# Altium PCB UC-526 - 1.PcbDoc
Units mil, origin at the board's own origin, x right, y up, seen from the top; angles counter-clockwise.
Board outline 1574.8 x 1574.8 mil, 2 copper layers (Top Layer, Bottom Layer); 115 components, 127 nets, 531 pads, 51 vias.
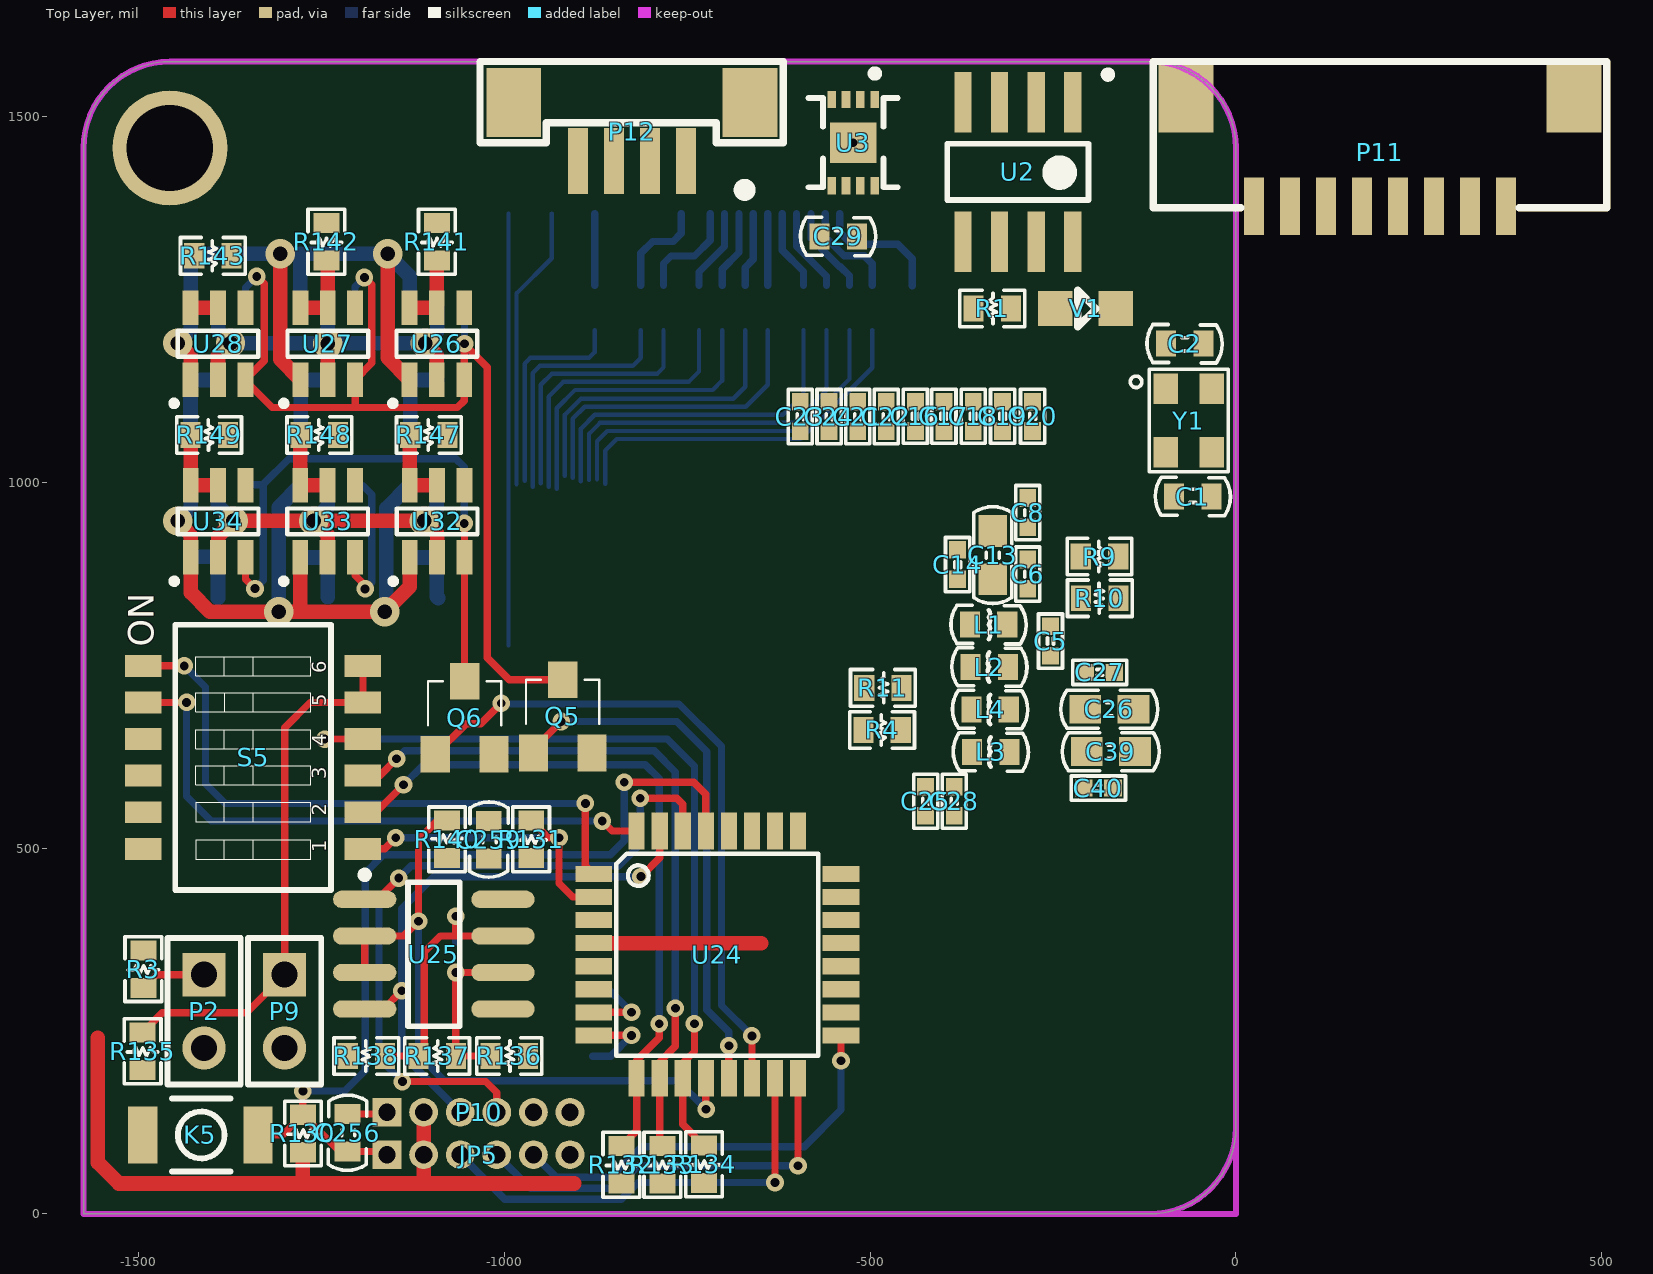
[diagram p0: Top Layer view]
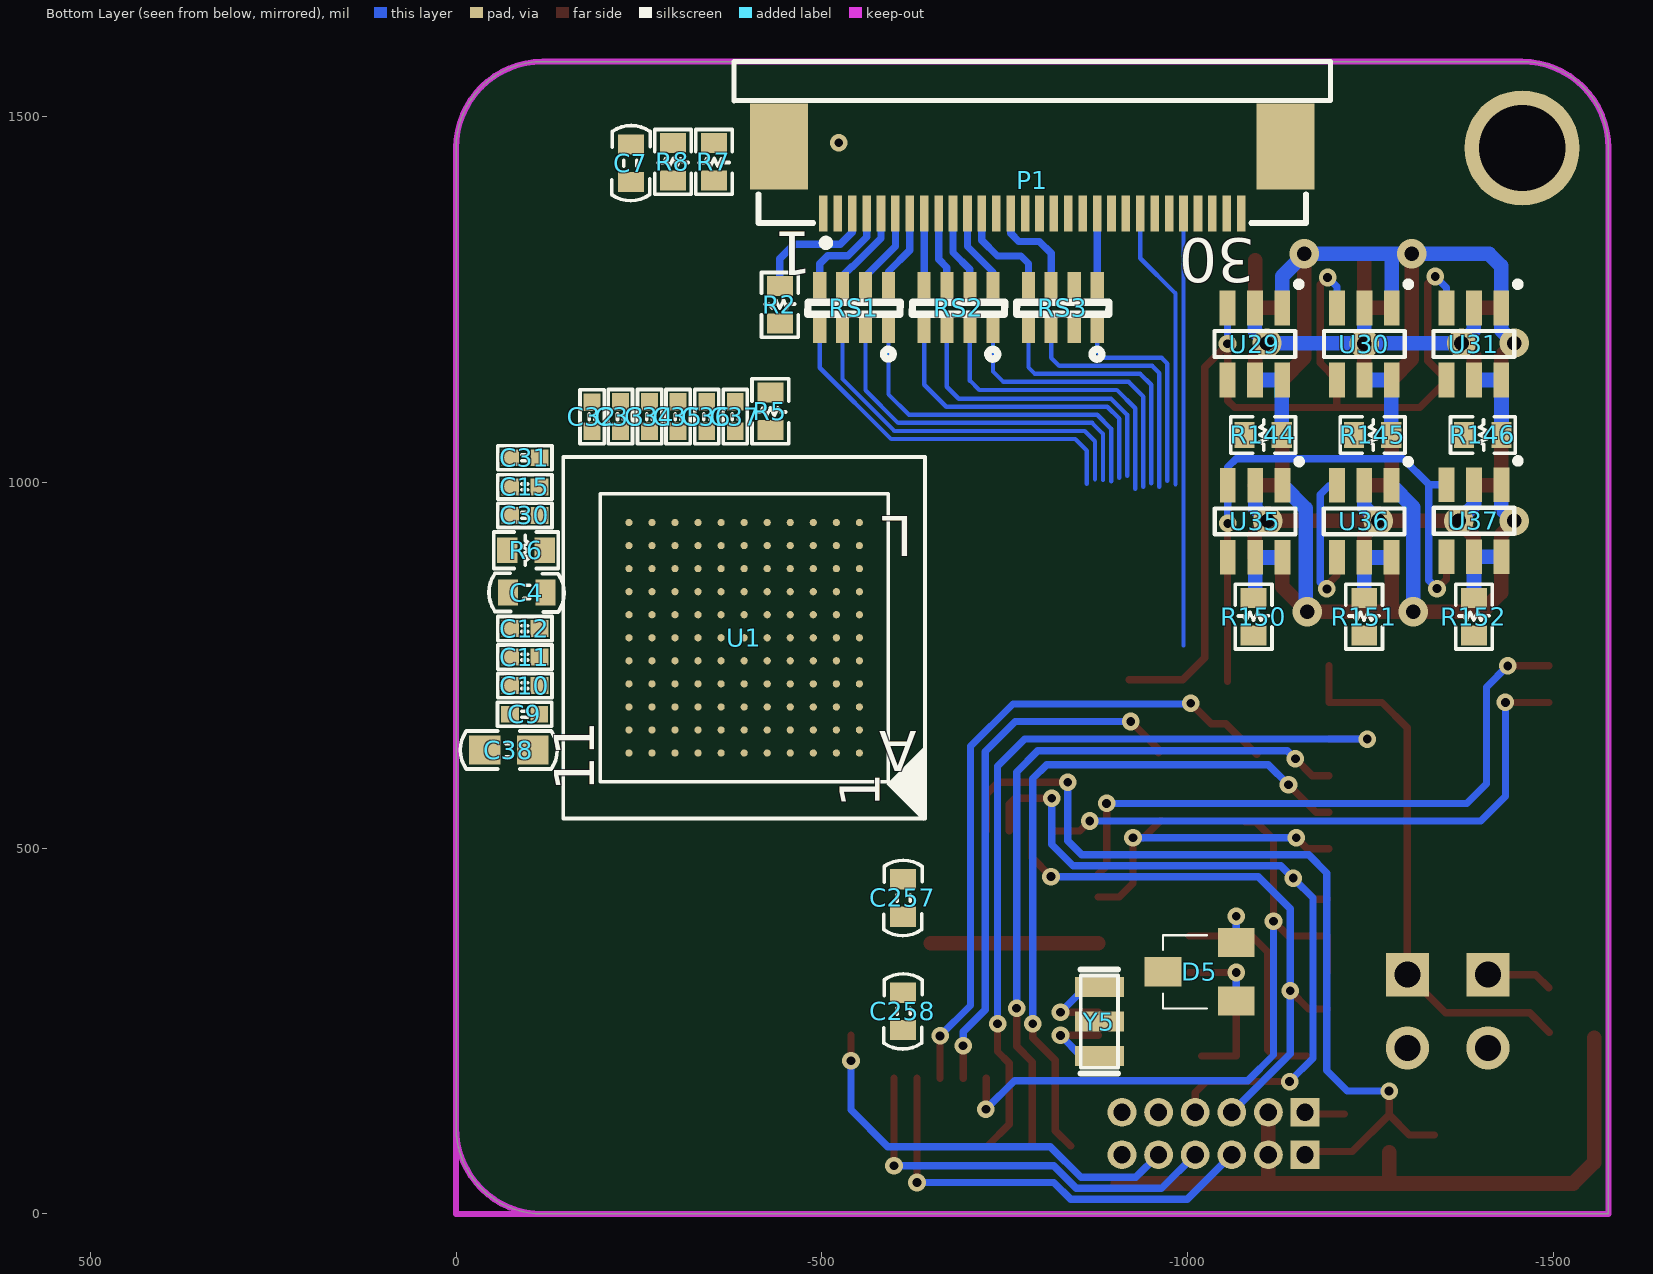
[diagram p1: Bottom Layer view, seen from below]

## Layer stack, top to bottom
Top Layer: signal copper 1.4
Dielectric: dielectric 12.6, FR-4, Dk 4.8
Bottom Layer: signal copper 1.4

## Board outline
-1574.8,0 -118.11,0 ccw(c-118.11,118.11) 0,118.11 0,1456.69 ccw(c-118.11,1456.69) -118.11,1574.8 -1456.69,1574.8 ccw(c-1456.69,1456.69) -1574.8,1456.69

## Design rules (kind name [scope] priority, off if disabled: settings)
Clearance [All] p1: gap=5
DiffPairsRouting [All] p1: maxlimit=10 minlimit=10 mostfreqgap=10 maxuncoupledlength=500
PolygonConnect [All] p1: connectstyle=Relief reliefconductorwidth=10 reliefentries=4 polygonreliefangle="90 Angle"
RoutingVias [All] p1: holewidth=28 width=50 viastyle="Through Hole" minholewidth=28 minwidth=50 maxholewidth=28 maxwidth=50
SilkscreenOverComponentPads [All] p1: minsilkscreentomaskgap=10
SolderMaskExpansion [All] p1: expansion=4
Width [All] p1: maxlimit=50 minlimit=5 preferedwidth=10
26 further rules are at their usual default settings.

## Classes and differential pairs
component class "LED_Driver - 1": C244 C245 C246 C247 C256 C257 C258 C259 D5 D22 D23 JP1 JP5 K1 K5 P9 P10 P11 P12 P13 Q5 Q6 R118 R119 R120 R121 R122 R123 R124 R125 R126 R127 R128 R129 R130 R131 R132 R133 R134 R135 R136 R137 R138 R140 R141 R142 R143 R144 R145 R146 R147 R148 R149 R150 R151 R152 S1 S5 U24 U25 U26 U27 U28 U29 U30 U31 U32 U33 U34 U35 U36 U37 Y5 Y6
component class "Cyusb3014 - 1": C1 C2 C4 C5 C6 C7 C8 C9 C10 C11 C12 C13 C14 C15 C16 C17 C18 C19 C20 C21 C22 C23 C24 C25 C26 C27 C28 C29 C30 C31 C32 C33 C34 C35 C36 C37 C38 C39 C40 L1 L2 L3 L4 P1 P2 R1 R2 R3 R4 R5 R6 R7 R8 R9 R10 R11 RS1 RS2 RS3 U1 U2 U3 V1 Y1
differential pair SST: +SST_P -SST_N

## Components (designator, comment, footprint, x,y, rotation, side; value= is the part's Value field where it differs from the comment)
C1 "12pF" 0603S-CAP -58.91,980.31 r0 top
C2 "12pF" 0603S-CAP -70.09,1189.31 r180 top
C4 "0.1u" 0603S-CAP -96.41,849 r180 bottom
C5 "0.1u" C0402 -253.4,782.99 r270 top
C6 "0.01u" C0402 -284.4,874.4 r90 top
C7 "0.1uF" 0603S-CAP -239,1436 r90 bottom
C8 "0.1u" C0402 -284.4,958.4 r270 top
C9 "0.01u" C0402 -93.69,683 r0 bottom
C10 "0.01u" C0402 -94,722 r0 bottom
C11 "0.01u" C0402 -94,761 r0 bottom
C12 "0.01u" C0402 -94,800 r0 bottom
C13 "2.2u" C0805S-CAP -332.4,900.4 r90 top
C14 "0.1u" C0402 -380.4,887.4 r90 top
C15 "0.01u" C0402 -94,993.5 r0 bottom
C16 "0.01u" C0402 -437.9,1090 r90 top
C17 "0.01u" C0402 -398.98,1090 r90 top
C18 "0.01u" C0402 -358.98,1090 r90 top
C19 "0.01u" C0402 -318.98,1090 r90 top
C20 "0.01u" C0402 -277.98,1090 r90 top
C21 "0.1u" C0402 -516.9,1089.71 r90 top
C22 "0.1u" C0402 -477.9,1089.71 r90 top
C23 "0.1u" C0402 -595.32,1089.71 r90 top
C24 "0.1u" C0402 -555.9,1089.71 r90 top
C25 "0.1u" C0402 -424,564 r90 top
C26 "22u" C0805S-CAP -173,689.81 r0 top
C27 "0.1u" C0402 -186,740 r0 top
C28 "0.1u" C0402 -385,564 r90 top
C29 "0.1u" 0603S-CAP -543.59,1336 r180 top
C30 "0.1u" C0402 -94,954.58 r0 bottom
C31 "0.1u" C0402 -94,1033.5 r0 bottom
C32 "0.1u" C0402 -185.9,1089.4 r90 bottom
C33 "0.1u" C0402 -224.56,1089.71 r90 bottom
C34 "0.1u" C0402 -264.48,1089.71 r90 bottom
C35 "0.1u" C0402 -303.48,1089.71 r90 bottom
C36 "0.1u" C0402 -342.48,1089.71 r90 bottom
C37 "0.1u" C0402 -381.48,1089.71 r90 bottom
C38 "22u" C0805S-CAP -72,634 r0 bottom
C39 "22u" C0805S-CAP -171,631.81 r0 top
C40 "0.1u" C0402 -188,582 r0 top
C256 "0.1uF" C0603 -1214,111 r90 top
C257 "0.1uF" C0603 -610.6,431.81 r90 bottom
C258 "0.1uF" C0603 -610.6,276.81 r90 bottom
C259 "0.1u" C0603 -1021,511.59 r90 top
D5 "SM712" SOT23-3 -1016,331 r90 bottom
JP5 "Header 3X2" MHDR1X6 -1160,81 r0 top
K5 "SW-PB" 157SW -1494,108 r180 top
L1 "磁珠" L0603 -337.99,805.4 r180 top
L2 "磁珠" L0603 -336.99,747.4 r0 top
L3 "磁珠" L0603 -334.99,631.4 r0 top
L4 "磁珠" L0603 -335.99,689.4 r0 top
P1 "30PIN" FH12-30S-0.5SH -787.4,1412.95 r180 bottom locked
P2 "Header 2" HDR1X2 -1410,327 r270 top
P9 "Header 2" HDR1X2 -1300,327 r270 top
P10 "FTDI Basic" MHDR1X6 -1160,139 r0 top
P11 "Header 8" SH_1.25MM*8 196.85,1524.87 r180 top
P12 "Header 4" SMT_1.25MM*4 -825.4,1479.4 r0 top
Q5 "BSS138" "SOT-23 (STANDARD)" -960,630 r0 top
Q6 "BSS138" "SOT-23 (STANDARD)" -1094,628 r0 top
R1 "10K" 0603S-RES -332.99,1237.4 r180 top
R2 "0" 0603S-RES -442.4,1242.4 r270 bottom
R3 "4.7K" 0603S-RES -1493,334.59 r90 top
R4 "4.7K" 0603S-RES -483.52,661.44 r0 top
R5 "4.7K" 0603S-RES -429.4,1096.93 r90 bottom
R6 "4.7K" 0603S-RES -95.59,907 r180 bottom
R7 "4.7K" 0603S-RES -352.42,1437.79 r90 bottom
R8 "4.7K" 0603S-RES -296.42,1437.79 r90 bottom
R9 "0" 0603S-RES -186.4,898.4 r0 top
R10 "6.04K-1%" 0603S-RES -185.99,841.4 r0 top
R11 "200-1%" 0603S-RES -482.41,719 r180 top
R130 "10K" R0603 -1275,110 r270 top
R131 "10K" R0603 -963,512 r270 top
R132 "10K" R0603 -839.88,67.28 r270 top
R133 "10K" R0603 -783.88,67.28 r270 top
R134 "10K" R0603 -727,68 r270 top
R135 "10K" R0603 -1494,222.41 r270 top
R136 "4.7K" R0603 -993,216 r0 top
R137 "120" R0603 -1091.59,216 r0 top
R138 "4.7K" R0603 -1188.18,216 r180 top
R140 "10K" R0603 -1078,512 r90 top
R141 "5.1" R0603 -1092,1328.6 r270 top
R142 "5.1" R0603 -1243,1328.6 r270 top
R143 "5.1" R0603 -1398,1309.4 r180 top
R144 "5.1" R0603 -1102.79,1064.61 r180 bottom
R145 "5.1" R0603 -1252.45,1064.61 r180 bottom
R146 "5.1" R0603 -1403.04,1064.61 r180 bottom
R147 "5.1" R0603 -1102.79,1064.61 r180 top
R148 "5.1" R0603 -1252.45,1064.61 r180 top
R149 "5.1" R0603 -1403.04,1064.61 r180 top
R150 "5.1" R0603 -1090,816.19 r90 bottom
R151 "5.1" R0603 -1241,816.19 r90 bottom
R152 "5.1" R0603 -1391,816.19 r90 bottom
RS1 "22" NC06-4 -591.4,1207.84 r0 bottom
RS2 "22" NC06-4 -734.07,1207.74 r0 bottom
RS3 "22" NC06-4 -876.57,1207.74 r0 bottom
S5 "SW DIP-6" DIP_SW_6WAY_SMD -1343,624 r90 top locked
U1 "FX3_121_BUMP_0" 121_BGA_FX3 -393.7,787.4 r0 bottom locked
U2 "M24M02-DRMN6TP" SOIC127P600X175-8N -298,1424 r270 top
U3 "ATSHA204-MAH-DA-T" UDFN -523,1464 r270 top
U24 "ATMEGA328" TQFP32-08 -708.66,354.33 r0 top locked
U25 "MAX485CSA" SOIC-8 -1096.08,355 r0 top locked
U26 "AL5802" SOT26 -1092,1189.4 r90 top
U27 "AL5802" SOT26 -1241,1189.4 r90 top
U28 "AL5802" SOT26 -1391,1189.4 r90 top
U29 "AL5802" SOT26 -1091.6,1188.83 r270 bottom
U30 "AL5802" SOT26 -1241.21,1188.83 r270 bottom
U31 "AL5802" SOT26 -1390.81,1188.83 r270 bottom
U32 "AL5802" SOT26 -1091.6,946.4 r90 top
U33 "AL5802" SOT26 -1241.21,946.4 r90 top
U34 "AL5802" SOT26 -1390.81,946.4 r90 top
U35 "AL5802" SOT26 -1092,946.4 r270 bottom
U36 "AL5802" SOT26 -1241,946.4 r270 bottom
U37 "AL5802" SOT26 -1391,947.4 r270 bottom
V1 "Red" LED0805S -205.4,1237.4 r0 top
Y1 "19.2MHZ" "爱普生晶振3.2×2.5MM - 无源" -64.5,1084.31 r270 top
Y5 "16MHz" RESONATOR-SMD -879,263 r90 bottom

## Footprints (in the part's own frame and the unit in brackets; to place one, negate y for a bottom-side part, rotate by r counter-clockwise, add the part's x,y. Pads: shape width x height; smd on the part's side, far side on the other; paste and mask are expansions set on the pad)
121_BGA_FX3 [mil]
  round 9.85 smd: A1(-157.45,157.45) A2(-125.96,157.45) A3(-94.47,157.45) A4(-62.98,157.45) A5(-31.49,157.45) A6(0,157.45) A7(31.49,157.45) A8(62.98,157.45) A9(94.47,157.45) A10(125.96,157.45) A11(157.45,157.45) B1(-157.45,125.96) B2(-125.96,125.96) B3(-94.47,125.96) B4(-62.98,125.96) B5(-31.49,125.96) B6(0,125.96) B7(31.49,125.96) B8(62.98,125.96) B9(94.47,125.96) B10(125.96,125.96) B11(157.45,125.96) C1(-157.45,94.47) C2(-125.96,94.47) C3(-94.47,94.47) C4(-62.98,94.47) C5(-31.49,94.47) C6(0,94.47) C7(31.49,94.47) C8(62.98,94.47) C9(94.47,94.47) C10(125.96,94.47) C11(157.45,94.47) D1(-157.45,62.98) D2(-125.96,62.98) D3(-94.47,62.98) D4(-62.98,62.98) D5(-31.49,62.98) D6(0,62.98) D7(31.49,62.98) D8(62.98,62.98) D9(94.47,62.98) D10(125.96,62.98) D11(157.45,62.98) E1(-157.45,31.49) E2(-125.96,31.49) E3(-94.47,31.49) E4(-62.98,31.49) E5(-31.49,31.49) E6(0,31.49) E7(31.49,31.49) E8(62.98,31.49) E9(94.47,31.49) E10(125.96,31.49) E11(157.45,31.49) F1(-157.45,0) F2(-125.96,0) F3(-94.47,0) F4(-62.98,0) F5(-31.49,0) F6(0,0) F7(31.49,0) F8(62.98,0) F9(94.47,0) F10(125.96,0) F11(157.45,0) G1(-157.45,-31.49) G2(-125.96,-31.49) G3(-94.47,-31.49) G4(-62.98,-31.49) G5(-31.49,-31.49) G6(0,-31.49) G7(31.49,-31.49) G8(62.98,-31.49) G9(94.47,-31.49) G10(125.96,-31.49) G11(157.45,-31.49) H1(-157.45,-62.98) H2(-125.96,-62.98) H3(-94.47,-62.98) H4(-62.98,-62.98) H5(-31.49,-62.98) H6(0,-62.98) H7(31.49,-62.98) H8(62.98,-62.98) H9(94.47,-62.98) H10(125.96,-62.98) H11(157.45,-62.98) J1(-157.45,-94.47) J2(-125.96,-94.47) J3(-94.47,-94.47) J4(-62.98,-94.47) J5(-31.49,-94.47) J6(0,-94.47) J7(31.49,-94.47) J8(62.98,-94.47) J9(94.47,-94.47) J10(125.96,-94.47) J11(157.45,-94.47) K1(-157.45,-125.96) K2(-125.96,-125.96) K3(-94.47,-125.96) K4(-62.98,-125.96) K5(-31.49,-125.96) K6(0,-125.96) K7(31.49,-125.96) K8(62.98,-125.96) K9(94.47,-125.96) K10(125.96,-125.96) K11(157.45,-125.96) L1(-157.45,-157.45) L2(-125.96,-157.45) L3(-94.47,-157.45) L4(-62.98,-157.45) L5(-31.49,-157.45) L6(0,-157.45) L7(31.49,-157.45) L8(62.98,-157.45) L9(94.47,-157.45) L10(125.96,-157.45) L11(157.45,-157.45)
  silkscreen extent -247,-247 247,250
157SW [mil]
  rect 40x78 smd: 1(0,0) 2(-157.5,0)
  silkscreen extent -120,-50 -40,50
0603S-CAP [mm]
  rect 0.7x0.9 smd: 1(-0.65,0) 2(0.65,0)
  silkscreen extent -1.31,-0.67 1.31,0.67
0603S-RES [mm]
  rect 0.7x0.9 smd: 1(-0.65,0) 2(0.65,0)
  silkscreen extent -1.12,-0.64 1.12,0.64
C0402 [mil]
  rect 24x23 smd: 1(-20,0) 2(20,0)
  silkscreen extent -37,-17 37,17, body extent -20,-10 19,10, height 20
C0603 [mm]
  rect 0.7x0.9 smd: 1(0.65,0) 2(-0.65,0)
  silkscreen extent -1.31,-0.67 1.31,0.67
C0805S-CAP [mm]
  rect 1.1x1 smd: 1(0.838,0) 2(-0.838,0)
  silkscreen extent -1.68,-0.66 1.68,0.66
DIP_SW_6WAY_SMD [mm]
  rect 0.76x1.27 smd: 1(-3.175,-3.81) 2(-1.905,-3.81) 3(-0.635,-3.81) 4(0.635,-3.81) 5(1.905,-3.81) 6(3.175,-3.81) 7(3.175,3.81) 8(1.905,3.81) 9(0.635,3.81) 10(-0.635,3.81) 11(-1.905,3.81) 12(-3.175,3.81)
  silkscreen extent -4.6,-2.7 4.6,2.7
FH12-30S-0.5SH [mm]
  rect 0.3x1.25 smd: 1(-7.25,-1.162) 2(-6.75,-1.162) 3(-6.25,-1.162) 4(-5.75,-1.162) 5(-5.25,-1.162) 6(-4.75,-1.162) 7(-4.25,-1.162) 8(-3.75,-1.162) 9(-3.25,-1.162) 10(-2.75,-1.162) 11(-2.25,-1.162) 12(-1.75,-1.162) 13(-1.25,-1.162) 14(-0.75,-1.162) 15(-0.25,-1.162) 16(0.25,-1.162) 17(0.75,-1.162) 18(1.25,-1.162) 19(1.75,-1.162) 20(2.25,-1.162) 21(2.75,-1.162) 22(3.25,-1.162) 23(3.75,-1.162) 24(4.25,-1.162) 25(4.75,-1.162) 26(5.25,-1.162) 27(5.75,-1.162) 28(6.25,-1.162) 29(6.75,-1.162) 30(7.25,-1.162)
  rect 2x3 smd: 31(-8.79,1.163) 31(8.79,1.163)
  silkscreen extent -10.35,-2.31 10.35,4.11
HDR1X2 [mm]
  rect 1.5x1.5 hole 0.9: 1(0,0)
  round 1.5 hole 0.9: 2(2.54,0)
  silkscreen extent -1.27,-1.27 3.81,1.27
L0603 [mm]
  rect 0.7x0.9 smd: 1(-0.65,0) 2(0.65,0)
  silkscreen extent -1.31,-0.67 1.31,0.67
LED0805S [mm]
  rect 1.2x1.2 smd: 1(-1.05,0) 2(1.05,0)
  silkscreen extent -0.27,-0.64 0.36,0.63, body extent -0.98,-0.46 1.08,0.45, height 0.85
MHDR1X6 [mm]
  rect 1x1 hole 0.6: 1(0,0)
  round 1 hole 0.6: 2(1.27,0) 3(2.54,0) 4(3.81,0) 5(5.08,0) 6(6.35,0)
NC06-4 [mil]
  rect 18x36 smd: 1(94.4,-0.16) 2(63.39,-0.16) 3(31.9,-0.16) 4(0.4,-0.16) 5(0.4,-61.16) 6(31.9,-61.16) 7(63.39,-61.16) 8(94.4,-61.16)
  silkscreen extent -16,-38 111,40
R0603 [mm]
  rect 0.7x0.9 smd: 1(0.65,0) 2(-0.65,0)
  silkscreen extent -1.12,-0.64 1.12,0.64
RESONATOR-SMD [mm]
  rect 0.7x1.7 smd: 1(-1.2,0) 2(0,0) 3(1.2,0)
  silkscreen extent -1.8,-0.65 1.8,0.65
SH_1.25MM*8 [mm]
  rect 0.7x2 smd: 1(-4.375,3.75) 2(-3.125,3.75) 3(-1.875,3.75) 4(-0.625,3.75) 5(0.625,3.75) 6(1.875,3.75) 7(3.125,3.75) 8(4.375,3.75)
  rect 1.9x2.4 smd: 9(-6.731,0) 9(6.731,0)
  silkscreen extent -7.87,-1.27 7.87,3.81
SMT_1.25MM*4 [mm]
  rect 0.7x2.3 smd: 1(1.875,-1.025) 2(0.625,-1.025) 3(-0.625,-1.025) 4(-1.875,-1.025)
  rect 1.9x2.4 smd: 7(-4.1,1) 7(4.1,1)
  silkscreen extent -5.28,-2.16 5.25,2.42
SOIC127P600X175-8N [mm]
  rect 2.1x0.6 smd: 1(-2.425,1.905) 2(-2.425,0.635) 3(-2.425,-0.635) 4(-2.425,-1.905) 5(2.425,-1.905) 6(2.425,-0.635) 7(2.425,0.635) 8(2.425,1.905)
  silkscreen extent -3.5,-2.45 0.98,3.25, body extent -1.95,-2.45 1.95,2.45, height 1.75
SOIC-8 [mm]
  oval 2.2x0.6 smd: 1(-2.4,1.905) 2(-2.4,0.635) 3(-2.4,-0.635) 4(-2.4,-1.905) 5(2.4,-1.905) 6(2.4,-0.635) 7(2.4,0.635) 8(2.4,1.905)
  silkscreen extent -2.52,-2.5 0.9,2.88, body extent -2,-2.5 2,2.5, height 1.75
SOT23-3 [mil]
  rect 40x50 smd: 1(40,-50) 2(-40,-50) 3(0,50)
  silkscreen extent -50,-10 50,50, body extent -59,-52 59,46, height 42
SOT26 [mm]
  rect 1.2x0.55 smd: 1(-1.25,0.95) 2(-1.25,0) 3(-1.25,-0.95) 4(1.25,-0.95) 5(1.25,0) 6(1.25,0.95)
  silkscreen extent -2.17,-1.4 0.45,1.62
"SOT-23 (STANDARD)" [mil]
  rect 40x50 smd: D(40,100) G(0,0) S(80,0)
  silkscreen extent -10,40 90,100, body extent -19,-2 99,96, height 42
TQFP32-08 [mil]
  rect 50x22 smd: 1(-169,110.24) 2(-169,78.74) 3(-169,47.25) 4(-169,15.75) 5(-169,-15.74) 6(-169,-47.24) 7(-169,-78.74) 8(-169,-110.24) 17(169.01,-110.23) 18(169,-78.73) 19(169,-47.24) 20(169,-15.74) 21(169,15.75) 22(169,47.25) 23(169,78.74) 24(169,110.24)
  rect 22x50 smd: 9(-110.24,-169) 10(-78.74,-169) 11(-47.24,-168.99) 12(-15.74,-169) 13(15.75,-169) 14(47.25,-169) 15(78.74,-169) 16(110.24,-169) 25(110.24,169) 26(78.74,169) 27(47.25,169) 28(15.75,169) 29(-15.75,169) 30(-47.24,169) 31(-78.73,169) 32(-110.23,169)
  silkscreen extent -138,-138 138,138
UDFN [mm]
  rect 0.6x0.3 smd: 1(-1.5,0.75) 2(-1.5,0.25) 3(-1.5,-0.25) 4(-1.5,-0.75) 5(1.5,-0.75) 6(1.5,-0.25) 7(1.5,0.25) 8(1.5,0.75)
  rect 1.4x1.6 smd: 4(0,0)
  silkscreen extent -2.52,-1.55 1.55,1.55, body extent -1.5,-1 1.52,1, height 0.6
"爱普生晶振3.2×2.5MM - 无源" [mm]
  rect 1.05x0.85 smd: 1(-1.1,-0.8) 2(1.1,0.8) 3(1.1,-0.8) 4(-1.1,0.8)
  Top Layer pour cut-out: -1.778,1.372 -1.778,-1.372 1.778,-1.372 1.778,1.372
  silkscreen extent -1.78,-2.03 1.78,1.37

## Part data
C1 C2: library part "CAP CER SMT 4.3pF 0805", "CAP CER SMT 4.3pF 0805"
C4: library part Cap, "50V/8.2u/0805"
C5 C6 C8 C9 C10 C11 C12 C13 C14 C15 C16 C17 C18 C19 C20 C21 C22 C23 C24 C25 C26 C27 C28 C30 C31 C32 C33 C34 C35 C36 C37 C38 C39 C40: library part CAP0805, "Capacitor"
C7: library part "CAP SMT 0.1uF 16V X7R", "CAP SMT 0.1uF 16V X7R"
C29: library part CAP, "RC=1206"
C256 C257 C258: library part "CAP SMT C100nF25V10%X7R", "Capacitor"
C259: library part Cap, "Capacitor"
JP5: "Header, 3-Pin, Dual row"
K5: "Switch"
L1 L2 L3 L4: library part Inductor, "Inductor"
P1: library part "Header 30", "Header, 30-Pin"
P2 P9: "Header, 2-Pin"
P10: library part ARDUINO_SERIAL_PROGRAMPTH
P11: "Header, 8-Pin"
P12: "Header, 4-Pin"
Q5 Q6: library part NMOS
R1 R2 R3 R4 R5 R6 R7 R8 R9 R10 R11 R130 R131 R132 R133 R134 R135 R136 R137 R138 R140 R141 R142 R143 R144 R145 R146 R147 R148 R149 R150 R151 R152: library part Res2, "Resistor"
RS1 RS2 RS3: library part RN4
S5: "DIP Switch, 6 Position, SPST"
U2: library part 24LC64-I/SN, "IC EEPROM 64KBIT 400KHZ 8SOIC"
U3: library part AT24C128
U24: library part ATMEGA168
U25: library part MAX3485CSA
V1: library part LED0, "Typical INFRARED GaAs LED"
Y1: library part "XTAL 32.768KHZ", "Crystal, CRYSTAL 32.768KHZ 6PF SMD"
Y5: library part RESONATORSMD

## Free pads (board coordinates)
  round 157.48 hole 118.11: 0(-1456.69,1456.69)

## Via types
v1: diameter 24, hole 12, Top Layer to Bottom Layer, tented both sides, 38 vias
v2: diameter 40, hole 20, Top Layer to Bottom Layer, tented both sides, 12 vias
v3: diameter 24, hole 12, Top Layer to Bottom Layer, 1 vias

## Nets (pads, with @x,y where several pads share a name; then routed paths per layer and width w, separated by ;. In a path a pad name is that pad's centre, name@x,y a point inside that pad or via, vN(x,y) a via of type N, cw(c..) or ccw(c..) an arc to the next point about the centre after c; other vN are vias at no path point)
A0: U24.23
A1: U24.24
A2: U24.25
A3: U24.26
A4: U24.27
A5: U24.28
A6: U24.19
A7: U24.22
AD1: R131.2 S5.1 U24.2 | length 439.2
  Top Layer w10: S5.1 -1163,499 v1(-1148,514) ; R131.2 -939.41,514 v1(-925,514) -925,452 -906.07,433.07 U24.2
  Bottom Layer w10: v1(-1148,514) v1(-925,514)
AD2: R132.2 S5.2 U24.9 | length 963.4
  Top Layer w10: S5.2 -1175,549 v1(-1137.5,586.5) ; R132.2 -818.9,113.86 U24.9 -818.9,210.1 -788,241 v1(-788,260)
  Bottom Layer w10: v1(-1137.5,586.5) -1110,614 -807,614 -788,595 v1(-788,260)
AD3: R133.2 S5.3 U24.10 | length 974.5
  Top Layer w10: S5.3 -1170.11,599 -1147.11,622 v1(-1147,622) ; R133.2 -787.4,96.39 U24.10 -787.4,207.6 -766,229 v1(-766,281)
  Bottom Layer w10: v1(-1147,622) -1136,633 -795,633 -766,604 v1(-766,281)
AD4: R134.2 S5.4 U24.11 | length 1109.3
  Top Layer w10: v1(-1245,649) S5.4 ; v1(-740,260) -740,222 -755.9,206.1 U24.11 -755.9,122.49 R134.2
  Bottom Layer w10: v1(-1245,649) -777,649 -740,612 v1(-740,260)
AREF: C257.2 U24.20
AVDD: C13.2 C14.1 L2.2 U1.A7
CLK_OUT: U1.D6
D0_IO: P1.18
D1_IO: P1.17
D2: P11.5 S5.8 U24.32 | length 861.7
  Top Layer w10: S5.8 v1(-1434,699) ; v1(-866,537) -852.33,523.33 U24.32
  Bottom Layer w10: v1(-1434,699) -1434,570.79 -1400.21,537 -1311,537 ; -1350.68,537 -1311,537 ; v1(-866,537) -1311,537
D2_IO: P1.16
D3: P11.6 S5.7 U24.1 | length 860.3
  Top Layer w10: S5.7 v1(-1437,749) ; v1(-889,561) -889,475.91 U24.1
  Bottom Layer w10: v1(-1437,749) -1408,720 -1408,588 -1381,561 v1(-889,561)
D3_IO: P1.15
D4_IO: P1.14 RS3.7 | length 137.6
  Bottom Layer w10: RS3.7 -813.18,1312.82 -797,1329 -769,1329 -757.87,1340.13 P1.14
D5_IO: P1.12 RS3.8 | length 143.4
  Bottom Layer w10: RS3.8 -782.17,1298.83 -772,1309 -740,1309 -718.5,1330.5 P1.12
D6_IO: P1.11 RS2.5 | length 112.7
  Bottom Layer w10: RS2.5 -733.66,1287.34 -698.82,1322.18 P1.11
D7_IO: P1.10 RS2.6 | length 107.8
  Bottom Layer w10: RS2.6 -702.17,1290.83 -679.13,1313.87 P1.10
D8: R140.1 U24.12 U25.2 U25.3 | length 948.9
  Top Layer w10: U25.3 U25.2 -1137,380 v1(-1117,400) -1117,512 -1092.82,536.18 R140.1@-1078,536.18 ; U24.12 -724.41,143.41 v1(-724,143)
  Bottom Layer w10: v1(-1117,400) -1117,217.21 -1081.79,182 -871,182 ; -864,182 -871,182 ; v1(-724,143) -763,182 -871,182
D8_IO: P1.9 RS2.7 | length 102.9
  Bottom Layer w10: RS2.7 -670.67,1293.33 -659.45,1304.55 P1.9
D9: Q5.G U24.13 | length 733.9
  Top Layer w10: Q5.G -960,635 v1(-922,673) ; U24.13 v1(-692.91,230)
  Bottom Layer w10: v1(-922,673) -764,673 -723,632 -723,279 -692.91,248.91 v1(-692.91,230)
D9_IO: P1.8 RS2.8 | length 98.2
  Bottom Layer w10: RS2.8@-639.76,1269 P1.8
D10: Q6.G U24.14 | length 914.9
  Top Layer w10: Q6.G -1052,670 -1032,670 v1(-1004,698) ; U24.14 v1(-661.41,243.41)
  Bottom Layer w10: v1@-1004,697 -761,697 -703,639 -703,285 v1(-661.41,243.41)
D10_IO: P1.7 RS1.5 | length 110.2
  Bottom Layer w10: P1.7 -620.08,1317.08 -591,1288 RS1.5
D11_IO: P1.6 RS1.6 | length 115.1
  Bottom Layer w10: P1.6 -600.39,1322.39 -559.5,1281.5 RS1.6
DTR: C256.1 P10.1 | length 51.6
  Top Layer w10: C256.1 P10.1@-1162.41,136.59
FRV_IO: P1.4 RS1.8 | length 140.9
  Bottom Layer w10: P1.4 -561.02,1335.02 -535.59,1309.59 -508,1309.59 -497,1298.59 RS1.8
FX3_CTL0: P1.23 U1.K8 | length 390.1
  Bottom Layer w6: -983.09,997 -983.09,1258 -935.04,1306.06 P1.23
FX3_CTL1: R2.2 U1.K7
FX3_CTL2: P1.26 U1.J7 | length 590.3
  Bottom Layer w6: -994.09,776.91 P1.26
FX3_CTL3: U1.H7
FX3_CTL4_SW: U1.G7
FX3_CTL5: U1.G6
FX3_CTL6: U1.K6
FX3_CTL7: U1.H8
FX3_CTL8: U1.G5 V1.2
FX3_CTL11: RS1.2 U1.J5 | length 499.3
  Bottom Layer w6: -873.09,1004 -873.09,1056 -859.09,1070 -599,1070 -528.01,1140.99 RS1.2
FX3_CTL12: RS1.1 U1.H5 | length 508.7
  Bottom Layer w6: -862.09,997.91 -862.09,1043 -846.09,1059 -594.44,1059 -497,1156.44 RS1.1
FX3_CTL15: R5.2 U1.L8
FX3_DQ0: RS3.2 U1.F10 | length 349.7
  Bottom Layer w6: -961.09,993.91 -961.09,1149 -951.09,1159 -840,1159 -824,1159 -813.18,1169.82 RS3.2
FX3_DQ1: RS3.1 U1.F9 | length 363.5
  Bottom Layer w6: -950.09,998.4 -950.09,1133 -935.09,1148 -834.76,1148 -791,1148 -782.17,1156.83 RS3.1
FX3_DQ2: RS2.4 U1.F7 | length 399.4
  Bottom Layer w6: -939.09,993.85 -939.09,1117 -919.09,1137 -748,1137 -733.66,1151.34 RS2.4
FX3_DQ3: RS2.3 U1.G10 | length 420.7
  Bottom Layer w6: -928.09,991 -928.09,1101 -903.09,1126 -777.25,1126 -715,1126 -702.17,1138.83 RS2.3
FX3_DQ4: RS2.2 U1.G9 | length 422.8
  Bottom Layer w6: -917.09,1009 -917.09,1091.91 -895,1114 -757.75,1114 -687,1114 -670.67,1130.33 RS2.2
FX3_DQ5: RS2.1 U1.F8 | length 441.1
  Bottom Layer w6: -906.09,1006 -906.09,1086.91 -890,1103 -670,1103 -639.66,1133.34 RS2.1
FX3_DQ6: RS1.4 U1.H10 | length 483.1
  Bottom Layer w6: -895.09,1001.44 -895.09,1073 -876.09,1092 -619,1092 -591,1120 RS1.4
FX3_DQ7: RS1.3 U1.H9 | length 494.7
  Bottom Layer w6: -884.09,1003 -884.09,1066 -869.09,1081 -604,1081 -559.5,1125.5 RS1.3
FX3_DQ8: U1.J10
FX3_DQ9: U1.J9
FX3_DQ10: U1.K11
FX3_DQ11: U1.L10
FX3_DQ12: U1.K10
FX3_DQ13: U1.K9
FX3_DQ14: U1.J8
FX3_DQ15: U1.G8
FX3_I2S_SCL: P1.21 R8.1 U1.D9 U2.6 U3.6
FX3_I2S_SDA: P1.22 R7.1 U1.D10 U2.5 U3.5
FX3_PCLK: RS3.4 U1.J6 | length 292.6
  Bottom Layer w6: -972.09,1002 -972.09,1162 -964.09,1170 -884,1170 -876.17,1177.83 RS3.4
FX3_RESET: C4.2 R6.2 U1.C5
FX3_SPI-MISO_UART-TX: U1.C2
FX3_SPI-MOSI_UART-RX: U1.D5
FX3_SPI-SCK_UART-RTS: U1.D4
FX3_SPI-SSN_UART-CTS: U1.C1
GND: C1.1 C2.1 C4.1 C5.2 C6.2 C7.1 C8.2 C9.2 C10.2 C11.2 C12.2 C13.1 C14.2 C15.2 C16.2 C17.2 C18.2 C19.2 C20.2 C21.2 C22.2 C23.2 C24.2 C26.1 C27.2 C29.2 C30.2 C31.2 C32.2 C33.2 C34.2 C35.2 C36.2 C37.2 C38.1 C39.1 C40.2 C257.1 C258.2 C259.1 D5.3 JP5.6 K5.1 P1.1 P1.13 P1.24 P1.25 P9.2 P10.5 P10.6 P11.1 P11.4 P11.7 P12.4 Q5.S Q6.S R9.2 R10.2 R11.2 R135.1 R138.1 R141.2 R142.2 R143.2 R144.2 R145.2 R146.2 R147.2 R148.2 R149.2 R150.2 R151.2 R152.2 S5.9 S5.10 S5.11 S5.12 U1.A1 U1.A8 U1.B2 U1.B4 U1.B7 U1.B8 U1.B9 U1.D8 U1.E2 U1.E6 U1.G1 U1.G11 U1.K3 U1.K4 U1.L1 U1.L2 U1.L3 U1.L6 U1.L11 U2.4 U3.4 U24.3 U24.5 U24.21 U25.5 U26.4 U27.4 U28.4 U29.4 U30.4 U31.4 U32.4 U33.4 U34.4 U35.4 U36.4 U37.4 Y5.2
  other v3: -523,1464
LIV_IO: P1.5 RS1.7 | length 120.7
  Bottom Layer w10: P1.5 -580.71,1333.5 -541.8,1294.59 -540.59,1294.59 -528.01,1282.01 RS1.7
MISO: JP5.4 U24.16 | length 562.8
  Top Layer w10: v1(-598.42,66) U24.16
  Bottom Layer w10: JP5.4 -964,35 -847.66,35 -816.66,66 v1(-598.42,66)
MOSI: JP5.3 U24.15 | length 607.1
  Top Layer w10: v1@-629.92,43.08 U24.15
  Bottom Layer w10: JP5.3 -999,20 -839.8,20 -816.8,43 v1(-629.92,43)
NetC5_1: C5.1 C6.1 L1.1 U1.B6
NetP2_1: P2.1 R3.1 | length 90.5
  Top Layer w10: R3.1 -1475,327 P2.1
NetP2_2: P2.2 U1.G4
NetQ5_D: Q5.D U26.3 U27.3 U28.3 U29.3 U30.3 U31.3 | length 1449.5
  Top Layer w10: U28.3@-1358,1143.11 -1317,1102.11 -1064,1102.11 -1054.6,1111.51 U26.3 -1054.6,1188.71 -1023,1157.11 -1023,760 -993,730 Q5.D ; U28.3 -1328,1165.79 -1328,1271.11 v1(-1338,1281.11) ; -1203.6,1103.51 U27.3 -1181,1162.79 -1181,1269.76 v1(-1190.98,1279.75)
  Bottom Layer w10: U31.3 -1353.41,1265.7 v1(-1338,1281.11) ; U30.3 -1203.81,1266.92 v1(-1190.98,1279.75) ; v1(-1054.2,1189.11) U29.3
NetQ6_D: Q6.D U32.3 U33.3 U34.3 U35.3 U36.3 U37.3 | length 1040.4
  Top Layer w10: U34.3 -1353.41,867.53 v1(-1340.5,854.61) ; U33.3 -1203.81,872.92 v1@-1191,860.11 ; Q6.D@-1054.2,728.2 U32.3 ; U32.3@-1054.2,890.31 U32.3 ; v1@-1054,943.11 -1054.2,942.92 U32.3
  Bottom Layer w10: U37.3 -1329.5,996.61 -1329,997.11 ; v1(-1340.5,854.61) -1329,866.11 -1329,997.11 ; U36.3 -1193.5,995.61 -1181,983.11 -1181,908.11 ; v1(-1190,854.11) -1181,863.11 -1181,908.11 ; -1181,883.11 -1181,908.11 ; v1(-1054.6,943.71) U35.3 -1054.6,1020.71 -1066,1032.11 -1294,1032.11 -1329,997.11
NetR1_1: R1.1 V1.1
NetR4_1: R4.1 U1.H4
NetR10_1: R10.1 U1.C8
NetR11_1: R11.1 U1.B3
NetR141_1: R141.1 U26.5 U26.6 | length 101.8
  Top Layer w20: U26.6 U26.5 R141.1
NetR142_1: R142.1 U27.5 U27.6 | length 99.8
  Top Layer w20: U27.6 U27.5 R142.1@-1241,1301.01
NetR143_1: R143.1 U28.5 U28.6 | length 37.4
  Top Layer w20: U28.6 U28.5
NetR144_1: R144.1 U29.5 U29.6 | length 112.7
  Bottom Layer w20: R144.1 -1128.38,1139 U29.6 U29.5
NetR145_1: R145.1 U30.5 U30.6 | length 112.6
  Bottom Layer w20: R145.1 -1278.04,1139.05 U30.6 U30.5
NetR146_1: R146.1 U31.5 U31.6 | length 112
  Bottom Layer w20: R146.1 U31.6@-1428.63,1139.2 ; U31.6 U31.5
NetR147_1: R147.1 U32.5 U32.6 | length 105.8
  Top Layer w20: R147.1@-1129,1063.99 U32.6 U32.5
NetR148_1: R148.1 U33.5 U33.6 | length 105.8
  Top Layer w20: R148.1@-1278.61,1064.05 U33.6 U33.5
NetR149_1: R149.1 U34.5 U34.6 | length 106.6
  Top Layer w20: R149.1 -1428.21,1064.19 U34.6 U34.5
NetR150_1: R150.1 U35.5 U35.6 | length 93.6
  Bottom Layer w20: U35.6 U35.5 -1092,843.78 R150.1
NetR151_1: R151.1 U36.5 U36.6 | length 91.9
  Bottom Layer w20: U36.6 U36.5 R151.1@-1241,842.7
NetR152_1: R152.1 U37.5 U37.6 | length 93.8
  Bottom Layer w20: U37.6 U37.5 R152.1
OSC_IN: U24.7 Y5.3 | length 119
  Top Layer w10: U24.7 v1(-826,275.59)
  Bottom Layer w10: Y5.3 -860.66,310.25 v1(-826,275.59)
OSC_OUT: U24.8 Y5.1 | length 116.4
  Top Layer w10: U24.8 v1(-826,244.09)
  Bottom Layer w10: Y5.1 -854.33,215.76 v1(-826,244.09)
OTG_ID: R9.1 U1.C9
OUT1: P12.2 U32.1 U33.1 U34.1 U35.1 U36.1 U37.1 | length 965.1
  Top Layer w20: v2@-1446.11,946.11 -1428.21,928.22 U34.1 -1428.21,849.33 -1402,823.11 v2(-1163,823.11) -1129,857.11 U32.1 ; -1278.61,828.72 U33.1
  Bottom Layer w20: v2@-1446.11,946.11 -1428.4,963.82 U37.1 ; v2(-1308,823.11) -1308,966.01 U36.1 ; v2@-1161,823.11 -1161,964.01 U35.1
  other v2: -1446.11,947.11
OUT2: P12.3 U26.1 U27.1 U28.1 U29.1 U30.1 U31.1 | length 974
  Top Layer w20: v2@-1446.11,1191.11 v2@-1445.52,1190.52 ; v2(-1445.92,1190.11) -1428.4,1172.59 U28.1 ; v2(-1306,1312.11) -1306,1167.79 U27.1 ; v2(-1159.22,1312.11) -1159.22,1170.01 U26.1
  Bottom Layer w20: v2(-1445.92,1190.11) -1428.21,1207.82 U31.1 -1428.21,1295.35 -1411.45,1312.11 v2(-1306,1312.11) -1160,1312.11 -1129,1281.11 U29.1 ; U30.1 -1278.61,1311.72
PCK_IO: P1.20 RS3.5 | length 98.3
  Bottom Layer w10: RS3.5@-875.98,1268.9 P1.20
RESET: C256.2 JP5.1 K5.2 R130.2 U24.29 | length 1224.1
  Top Layer w10: K5.2 -1302.59,108 R130.2 ; v1(-1275,168) R130.2 ; JP5.1@-1164.41,85.41 C256.2 -1224.82,85.41 R130.2 ; v1(-836,590) -741,590 -724.41,573.41 U24.29
  Bottom Layer w10: v1(-1275,168) -1218,168 -1190,196 -1190,466 -1165,491 -855,491 -836,510 v1(-836,590)
RX/B: D5.1 P11.3 R137.2 R138.2 U25.7 | length 369.3
  Top Layer w10: R138.2 R137.2 -1109,224.18 -1109,358 -1087,380 -1066,380 ; v1(-1066,407) -1066,380 ; U25.7 -1066,380
  Bottom Layer w10: D5.1@-1066,372 v1(-1066,407)
RXI: P10.4 U24.30 U25.1 | length 1033.3
  Top Layer w10: U25.1 -1173,430 v1(-1144,459) ; v1(-1139,181) -1025,181 -1010,166 P10.4 ; v1(-814,568) -764,568 -755.9,559.9 U24.30
  Bottom Layer w10: v1(-1139,181) -1171,213 -1171,432 v1(-1144,459) -1127,476 -843,476 -814,505 v1(-814,568)
RXVDDQ: C39.2 C40.1 L3.2 U1.A2
SCK: JP5.5 U24.17 | length 573.2
  Top Layer w10: v1(-539.66,209.34) U24.17
  Bottom Layer w10: JP5.5 -929,50 -853.87,50 -811.87,92 -590,92 -539.66,142.34 v1(-539.66,209.34)
SST_N: C28.2 U1.A6
SST_P: C25.2 U1.A5
STB_IO: P1.2
TIGG_IO: P1.3 R2.1 | length 177.1
  Bottom Layer w10: P1.3 -541.34,1341.34 -525,1325 -462,1325 -442.4,1305.4 R2.1
TX/A: D5.2 P11.2 R136.2 R137.1 U25.6 | length 263.8
  Top Layer w10: R136.2 R137.1 v1(-1066,330) U25.6
  Bottom Layer w10: D5.2@-1066,292 v1(-1066,330)
TXO: P10.3 U24.31 U25.4 | length 790.1
  Top Layer w10: U25.4@-1190.48,280.09 -1164.91,280.09 v1(-1140,305) ; v1(-813,461) -787.4,486.6 U24.31
  Bottom Layer w10: P10.3 -1140,219 v1(-1140,305) -1140,417 -1096,461 v1(-813,461)
TXVDDQ: C26.2 C27.1 L4.2 U1.B5
USB_DS1_DM: U1.A10
USB_DS1_DP: U1.A9
USB_DS1_RXM: U1.A3
USB_DS1_RXP: U1.A4
USB_DS1_TXM: C28.1
USB_DS1_TXP: C25.1
UTIGGER: P9.1 R135.2 S5.5 S5.6 | length 735.5
  Top Layer w10: R135.2 -1467,275 -1352,275 P9.1 -1300,664.4 -1265.4,699 S5.5 S5.6
VCC(+3.3V): C7.2 C15.1 C16.1 C17.1 C18.1 C19.1 C20.1 C29.1 C30.1 C31.1 C32.1 C33.1 C34.1 C35.1 C36.1 C37.1 L1.2 P1.27 P1.28 P1.29 P1.30 R1.2 R3.2 R4.2 R5.1 R6.1 R7.2 R8.2 U1.B1 U1.C11 U1.E3 U1.E10 U1.F1 U1.H11 U1.L9 U2.8 U3.8
VCC(+5V): C8.1 C258.1 C259.2 JP5.2 P10.2 R130.1 R131.1 R132.1 R133.1 R134.1 R136.1 R140.2 U1.E11 U24.4 U24.6 U24.18 U25.8 | length 1199.1
  Top Layer w20: -1555.4,240.4 -1555.4,70.4 -1526.69,41.69 -904,41.69 ; -1275,43.69 R130.1 ; -1110,42.69 JP5.2 P10.2 ; U24.4 -648.92,370.08
VCC_9V: P11.8 P12.1 U26.2 U27.2 U28.2 U29.2 U30.2 U31.2 U32.2 U33.2 U34.2 U35.2 U36.2 U37.2 | length 1190.3
  Top Layer w20: U28.2 -1391,1173.11 v2(-1374,1190.11) ; U34.2 -1390.81,926.3 v2(-1370,947.11) v2(-1260,947.11) ; U33.2 -1241.21,928.32 v2(-1260,947.11) ; U27.2 v2(-1241,1189.11) ; v2(-1108,1190.11) -1092,1174.11 U26.2 ; U32.2 -1091.6,929.71 v2(-1109,947.11) v2(-1260,947.11)
  Bottom Layer w20: U37.2 -1391,968.11 v2(-1370,947.11) ; U31.2 -1390.81,1206.93 v2(-1374,1190.11) v2(-1108,1190.11) -1091.6,1206.51 U29.2 ; v2(-1260,947.11) -1241,966.11 U36.2 ; v2@-1241.21,1190.32 U30.2 ; v2(-1109,947.11) -1092,964.11 U35.2
VDD(+1.2V): C9.1 C10.1 C11.1 C12.1 C21.1 C22.1 C23.1 C24.1 C38.2 L2.1 L3.1 L4.1 U1.B10 U1.C3 U1.E9 U1.F11 U1.H1 U1.J11 U1.L5 U1.L7
XCK_IO: P1.19
XTAL_IN: C2.2 U1.C6 Y1.1
XTAL_OUT: C1.2 U1.C7 Y1.2
pads on no net: P1.31 P11.9 P12.7 RS3.3 RS3.6 U1.A11 U1.B11 U1.C4 U1.C10 U1.D1 U1.D2 U1.D3 U1.D7 U1.D11 U1.E1 U1.E4 U1.E5 U1.E7 U1.E8 U1.F2 U1.F3 U1.F4 U1.F5 U1.F6 U1.G2 U1.G3 U1.H2 U1.H3 U1.H6 U1.J1 U1.J2 U1.J3 U1.J4 U1.K1 U1.K2 U1.K5 U1.L4 U2.1 U2.2 U2.3 U2.7 U3.1 U3.2 U3.3 U3.7 Y1.3 Y1.4

## Keep-outs
Keep-Out Layer:
  lines w7.87: -157.48,0 0,0 0,157.48 ; -1574.8,0 -1574.8,1456.69 cw(c-1456.69,1456.69) -1456.69,1574.8 -118.11,1574.8 cw(c-118.11,1456.69) 0,1456.69 0,118.11 cw(c-118.11,118.11) -118.11,0 -1574.8,0

## Silkscreen, mask and mechanical layers (free items; w line width, h text height)
Mechanical 13:
  lines w7.87: -787.4,846.4 -787.4,787.4 -701.4,787.4 ; -590.55,0 0,0 0,590.55 -590.55,590.55 -590.55,0

## Text inside footprints (layer, text, board x,y; h text height)
P1: Bottom Overlay "30" at -1092.4,1332.95 h60 r180; Bottom Overlay "1" at -486.4,1341.95 h60 r180
S5: Top Overlay "6" at -1243,739 h19.68 r90; Top Overlay "5" at -1243,694 h19.68 r90; Top Overlay "1" at -1243,494 h19.68 r90; Top Overlay "2" at -1243,544 h19.68 r90; Top Overlay "3" at -1243,594 h19.68 r90; Top Overlay "4" at -1243,639 h19.68 r90; Top Overlay "ON" at -1467,775 h60 r90
U1: Bottom Overlay "L" at -624.3,953.8 h55 r180; Bottom Overlay "A" at -629.3,659.8 h55 r180; Bottom Overlay "11" at -188.7,577.4 h55 r270; Bottom Overlay "1" at -578.9,554.9 h55 r270; Mechanical 15 "A" at -623.7,627.4 h55 r180; Mechanical 15 "L" at -622.7,962.4 h55 r180; Mechanical 15 "11" at -243.7,577.4 h55 r180; Mechanical 15 "1" at -558.7,572.4 h55 r180; Mechanical 16 "E10" at -267.74,722.31 h55 r180; Mechanical 16 "D11" at -236.25,690.82 h55 r180; Mechanical 16 "A11" at -236.25,596.35 h55 r180; Mechanical 16 "C9" at -299.23,670.53 h55 r180; Mechanical 16 "F2" at -519.66,765 h55 r180; Mechanical 16 "E3" at -488.17,733.51 h55 r180; Mechanical 16 "F1" at -551.15,765 h55 r180; Mechanical 16 "L9" at -299.23,922.45 h55 r180; Mechanical 16 "H11" at -236.25,816.78 h55 r180; Mechanical 16 "J4" at -456.68,859.47 h55 r180; Mechanical 16 "F4" at -456.68,765 h55 r180; Mechanical 16 "J3" at -488.17,859.47 h55 r180; Mechanical 16 "J1" at -551.15,859.47 h55 r180; Mechanical 16 "E4" at -456.68,733.51 h55 r180; Mechanical 16 "E5" at -425.19,733.51 h55 r180; Mechanical 16 "G2" at -519.66,796.49 h55 r180; Mechanical 16 "F5" at -425.19,765 h55 r180; Mechanical 16 "K2" at -519.66,890.96 h55 r180; Mechanical 16 "E1" at -551.15,733.51 h55 r180; Mechanical 16 "G8" at -330.72,796.49 h55 r180; Mechanical 16 "L10" at -267.74,911.25 h55 r180; Mechanical 16 "F8" at -330.72,765 h55 r180; Mechanical 16 "F3" at -488.17,765 h55 r180; Mechanical 16 "K1" at -551.15,890.96 h55 r180; Mechanical 16 "J10" at -267.74,848.27 h55 r180; Mechanical 16 "G6" at -393.7,796.49 h55 r180; Mechanical 16 "K6" at -393.7,890.96 h55 r180; Mechanical 16 "K9" at -299.23,890.96 h55 r180; Mechanical 16 "J9" at -299.23,859.47 h55 r180; Mechanical 16 "F10" at -267.74,753.8 h55 r180; Mechanical 16 "H9" at -299.23,827.98 h55 r180; Mechanical 16 "J5" at -425.19,859.47 h55 r180; Mechanical 16 "G9" at -299.23,796.49 h55 r180; Mechanical 16 "K11" at -236.25,879.76 h55 r180; Mechanical 16 "G10" at -267.74,785.29 h55 r180; Mechanical 16 "H10" at -267.74,816.78 h55 r180; Mechanical 16 "J8" at -330.72,859.47 h55 r180; Mechanical 16 "K10" at -267.74,879.76 h55 r180; Mechanical 16 "F7" at -362.21,765 h55 r180; Mechanical 16 "G5" at -425.19,796.49 h55 r180; Mechanical 16 "K5" at -425.19,890.96 h55 r180; Mechanical 16 "H8" at -330.72,827.98 h55 r180; Mechanical 16 "H6" at -393.7,827.98 h55 r180; Mechanical 16 "H5" at -425.19,827.98 h55 r180; Mechanical 16 "F9" at -299.23,765 h55 r180; Mechanical 16 "H3" at -488.17,827.98 h55 r180; Mechanical 16 "G3" at -488.17,796.49 h55 r180; Mechanical 16 "H2" at -519.66,827.98 h55 r180; Mechanical 16 "J2" at -519.66,859.47 h55 r180; Mechanical 16 "B11" at -236.25,627.84 h55 r180; Mechanical 16 "E8" at -330.72,733.51 h55 r180; Mechanical 16 "C10" at -267.74,659.33 h55 r180; Mechanical 16 "E7" at -362.21,733.51 h55 r180; Mechanical 16 "F6" at -393.7,765 h55 r180; Mechanical 16 "B6" at -393.7,639.04 h55 r180; Mechanical 16 "D2" at -519.66,702.02 h55 r180; Mechanical 16 "C4" at -456.68,670.53 h55 r180; Mechanical 16 "C5" at -425.19,670.53 h55 r180; Mechanical 16 "D1" at -551.15,702.02 h55 r180; Mechanical 16 "D4" at -456.68,702.02 h55 r180; Mechanical 16 "K8" at -330.72,890.96 h55 r180; Mechanical 16 "J6" at -393.7,859.47 h55 r180; Mechanical 16 "J7" at -362.21,859.47 h55 r180; Mechanical 16 "C8" at -330.72,670.53 h55 r180; Mechanical 16 "B3" at -488.17,639.04 h55 r180; Mechanical 16 "H7" at -362.21,827.98 h55 r180; Mechanical 16 "A5" at -425.19,607.55 h55 r180; Mechanical 16 "G7" at -362.21,796.49 h55 r180; Mechanical 16 "A6" at -393.7,607.55 h55 r180; Mechanical 16 "K7" at -362.21,890.96 h55 r180; Mechanical 16 "C2" at -519.66,670.53 h55 r180; Mechanical 16 "D3" at -488.17,702.02 h55 r180; Mechanical 16 "D5" at -425.19,702.02 h55 r180; Mechanical 16 "D7" at -362.21,702.02 h55 r180; Mechanical 16 "D6" at -393.7,702.02 h55 r180; Mechanical 16 "C1" at -551.15,670.53 h55 r180; Mechanical 16 "E9" at -299.23,733.51 h55 r180; Mechanical 16 "B10" at -267.74,627.84 h55 r180; Mechanical 16 "L7" at -362.21,922.45 h55 r180; Mechanical 16 "L5" at -425.19,922.45 h55 r180; Mechanical 16 "H1" at -551.15,827.98 h55 r180; Mechanical 16 "C3" at -488.17,670.53 h55 r180; Mechanical 16 "J11" at -236.25,848.27 h55 r180; Mechanical 16 "F11" at -236.25,753.8 h55 r180; Mechanical 16 "D9" at -299.23,702.02 h55 r180; Mechanical 16 "D10" at -267.74,690.82 h55 r180; Mechanical 16 "A4" at -456.68,607.55 h55 r180; Mechanical 16 "E11" at -236.25,722.31 h55 r180; Mechanical 16 "A7" at -362.21,607.55 h55 r180; Mechanical 16 "A10" at -267.74,596.35 h55 r180; Mechanical 16 "A9" at -299.23,607.55 h55 r180; Mechanical 16 "A3" at -488.17,607.55 h55 r180; Mechanical 16 "G4" at -456.68,796.49 h55 r180; Mechanical 16 "H4" at -456.68,827.98 h55 r180; Mechanical 16 "L8" at -330.72,922.45 h55 r180; Mechanical 16 "L4" at -456.68,922.45 h55 r180; Mechanical 16 "C7" at -362.21,670.53 h55 r180; Mechanical 16 "B2" at -519.66,639.04 h55 r180; Mechanical 16 "B4" at -456.68,639.04 h55 r180; Mechanical 16 "E6" at -393.7,733.51 h55 r180; Mechanical 16 "C6" at -393.7,670.53 h55 r180; Mechanical 16 "B1" at -551.15,639.04 h55 r180; Mechanical 16 "C11" at -236.25,659.33 h55 r180; Mechanical 16 "A2" at -519.66,607.55 h55 r180; Mechanical 16 "B5" at -425.19,639.04 h55 r180; Mechanical 16 "L6" at -393.7,922.45 h55 r180; Mechanical 16 "A1" at -551.15,607.55 h55 r180; Mechanical 16 "E2" at -519.66,733.51 h55 r180; Mechanical 16 "L2" at -519.66,922.45 h55 r180; Mechanical 16 "L1" at -551.15,922.45 h55 r180; Mechanical 16 "K3" at -488.17,890.96 h55 r180; Mechanical 16 "G1" at -551.15,796.49 h55 r180; Mechanical 16 "K4" at -456.68,890.96 h55 r180; Mechanical 16 "L3" at -488.17,922.45 h55 r180; Mechanical 16 "A8" at -330.72,607.55 h55 r180; Mechanical 16 "B8" at -330.72,639.04 h55 r180; Mechanical 16 "B9" at -299.23,639.04 h55 r180; Mechanical 16 "D8" at -330.72,702.02 h55 r180; Mechanical 16 "B7" at -362.21,639.04 h55 r180; Mechanical 16 "L11" at -236.25,911.25 h55 r180; Mechanical 16 "G11" at -236.25,785.29 h55 r180